# Altium PCB EE209_PCB.PcbDoc
Units mm, origin at the board's own origin, x right, y up, seen from the top; angles counter-clockwise.
Board outline 81.03 x 67.82 mm, 2 copper layers (Top Layer, Bottom Layer); 11 components, 12 nets, 35 pads, 4 vias.
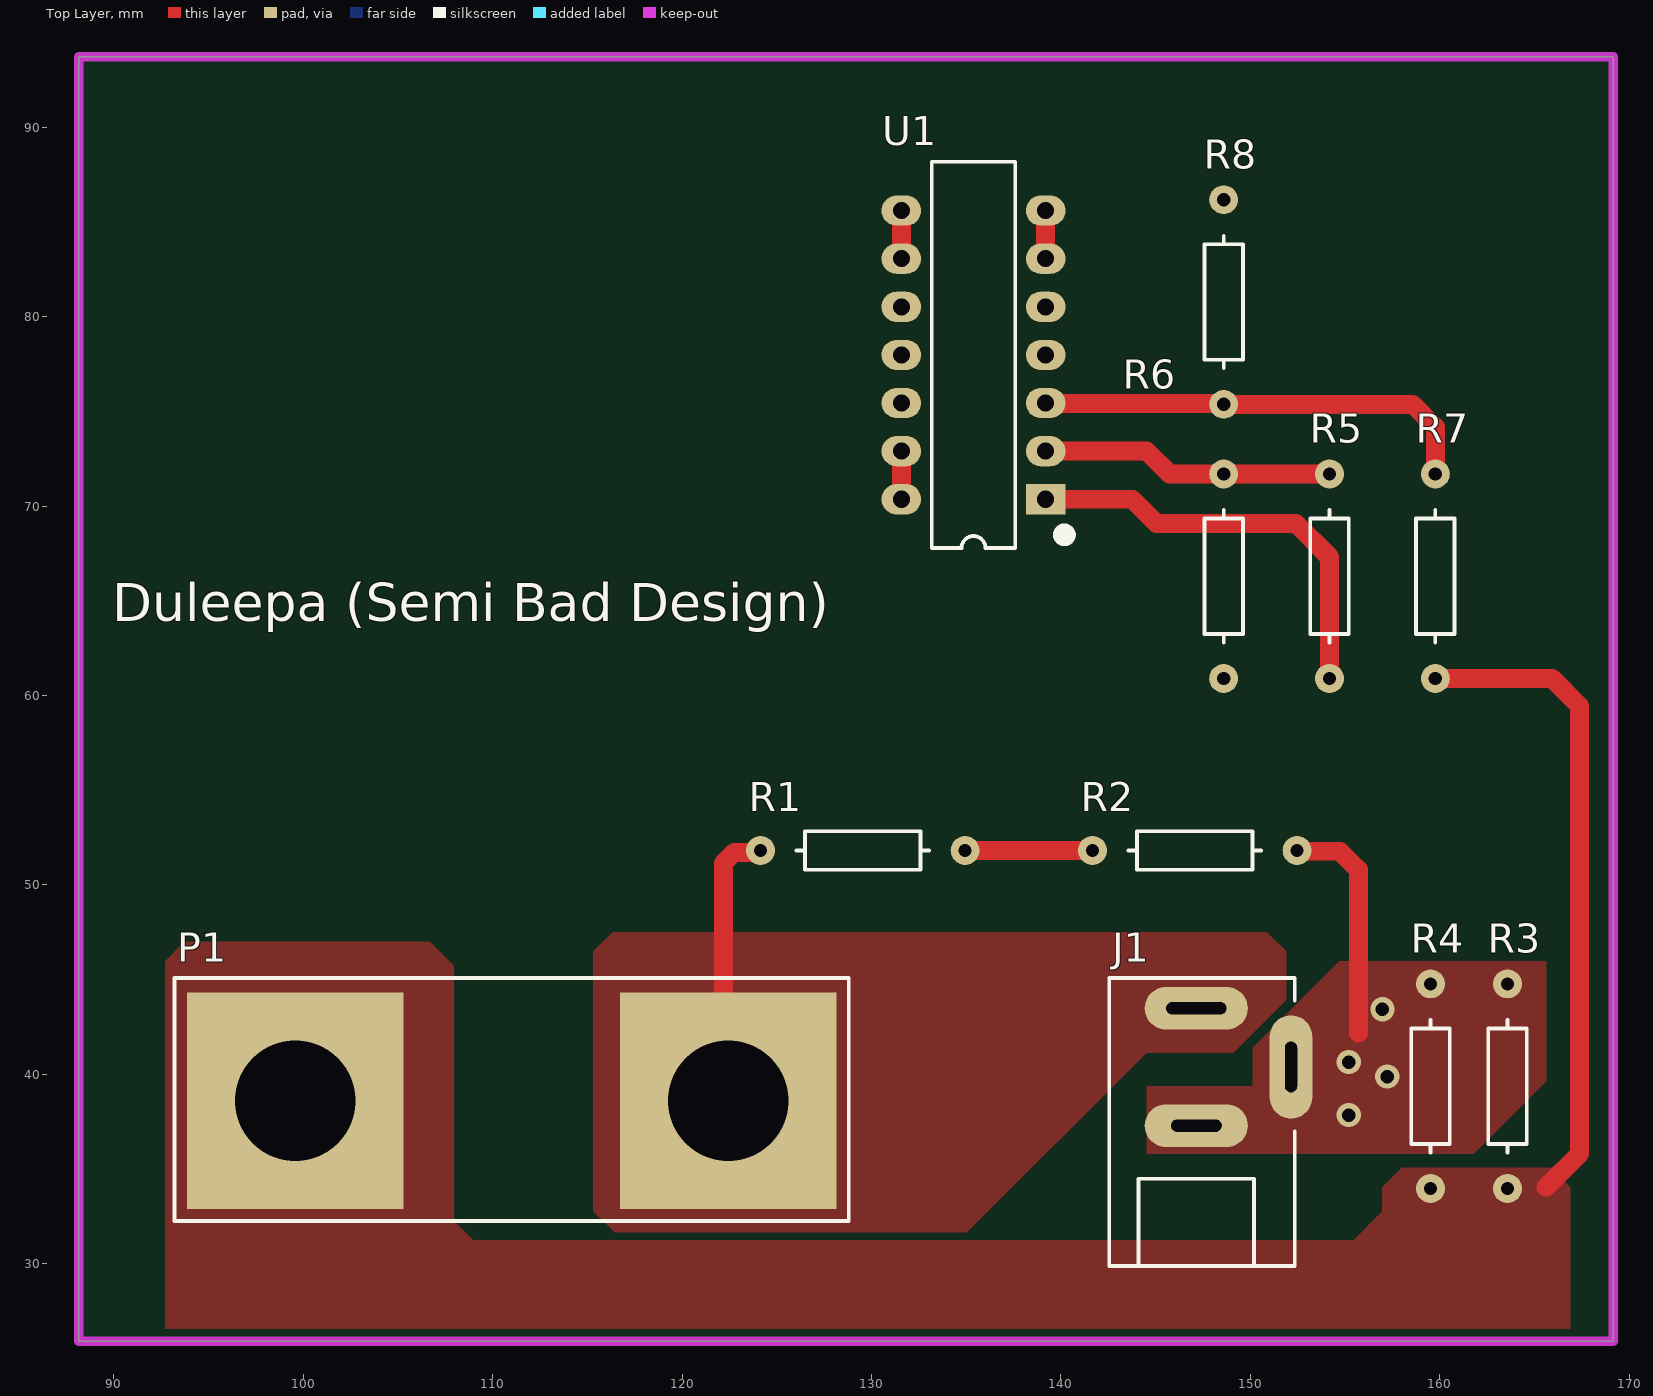
[diagram p0: Top Layer view]
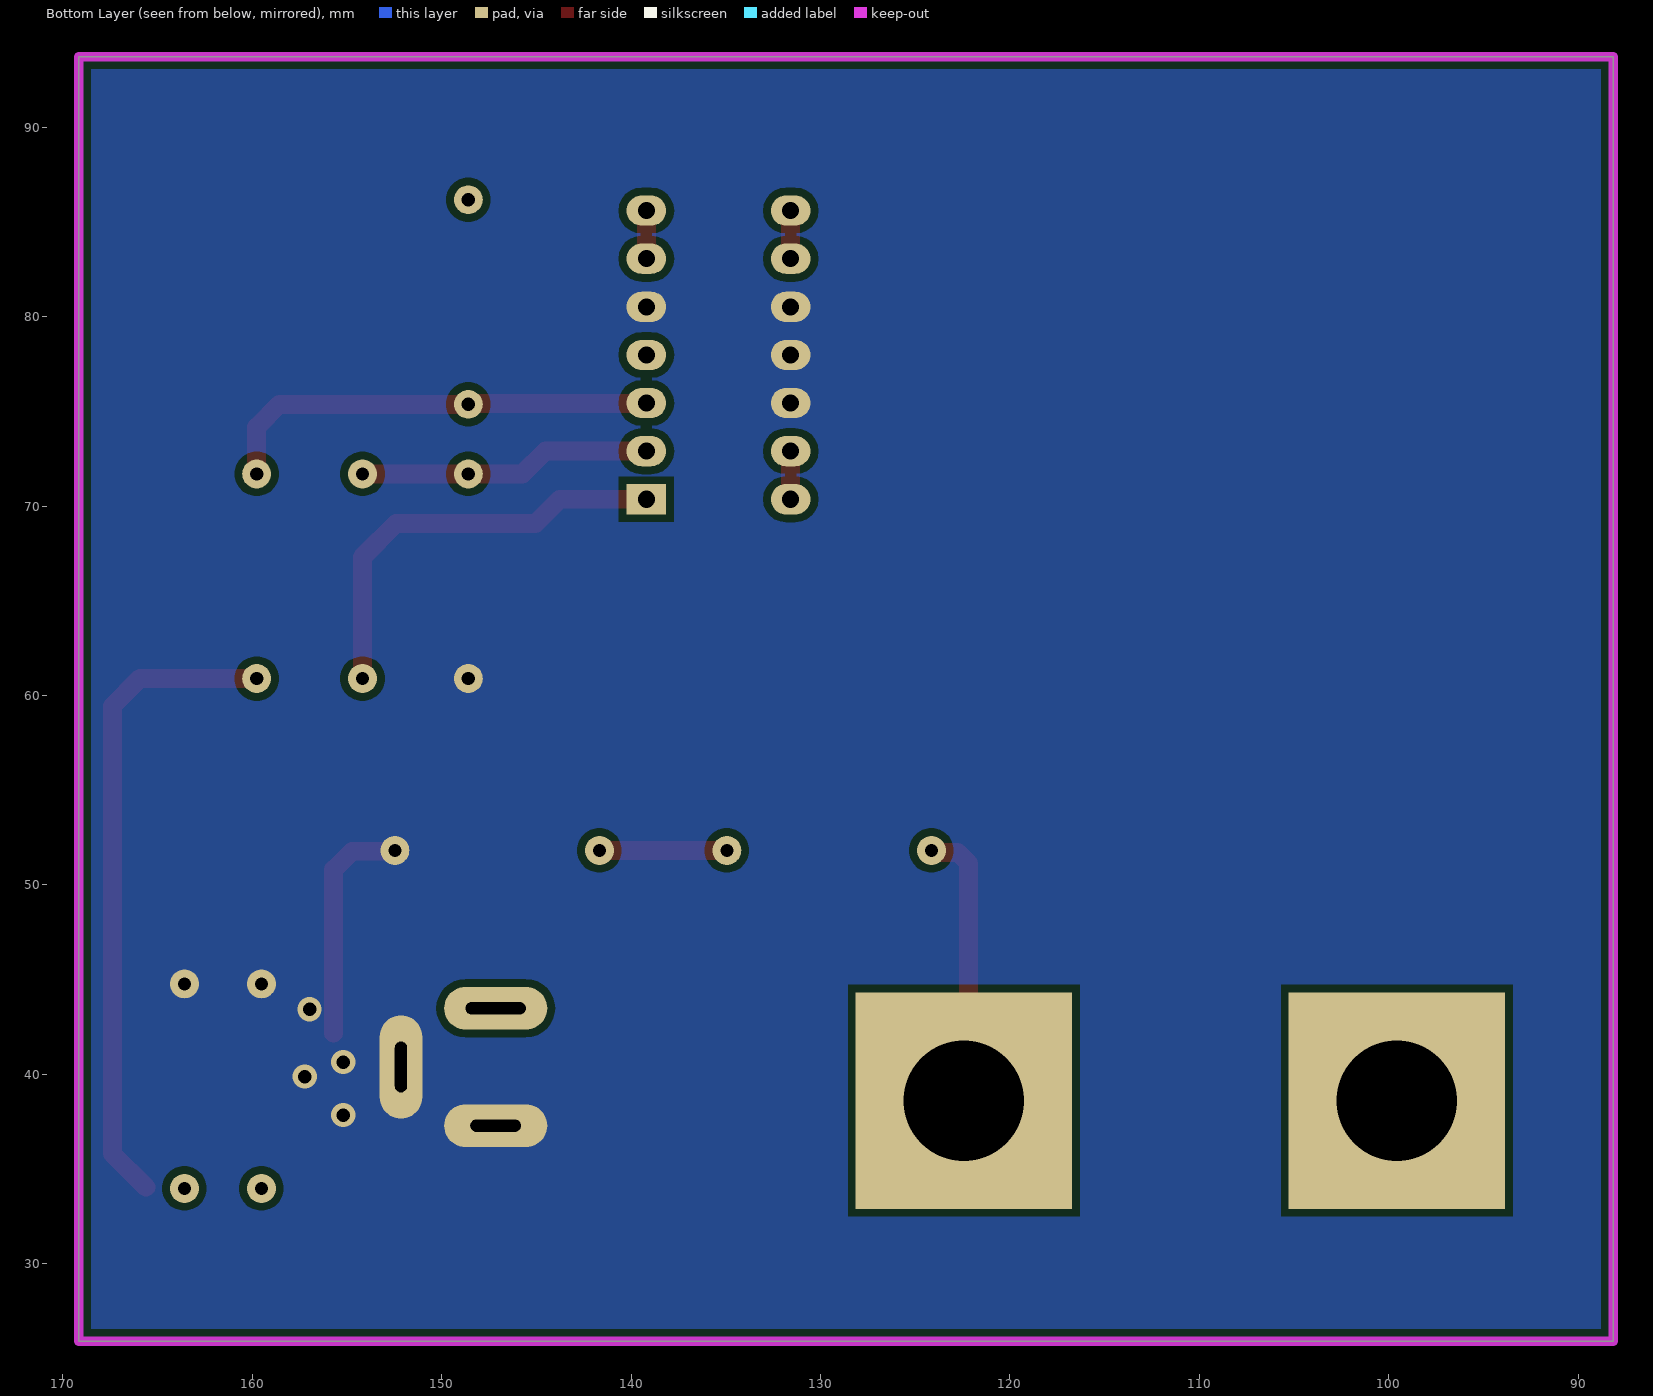
[diagram p1: Bottom Layer view, seen from below]
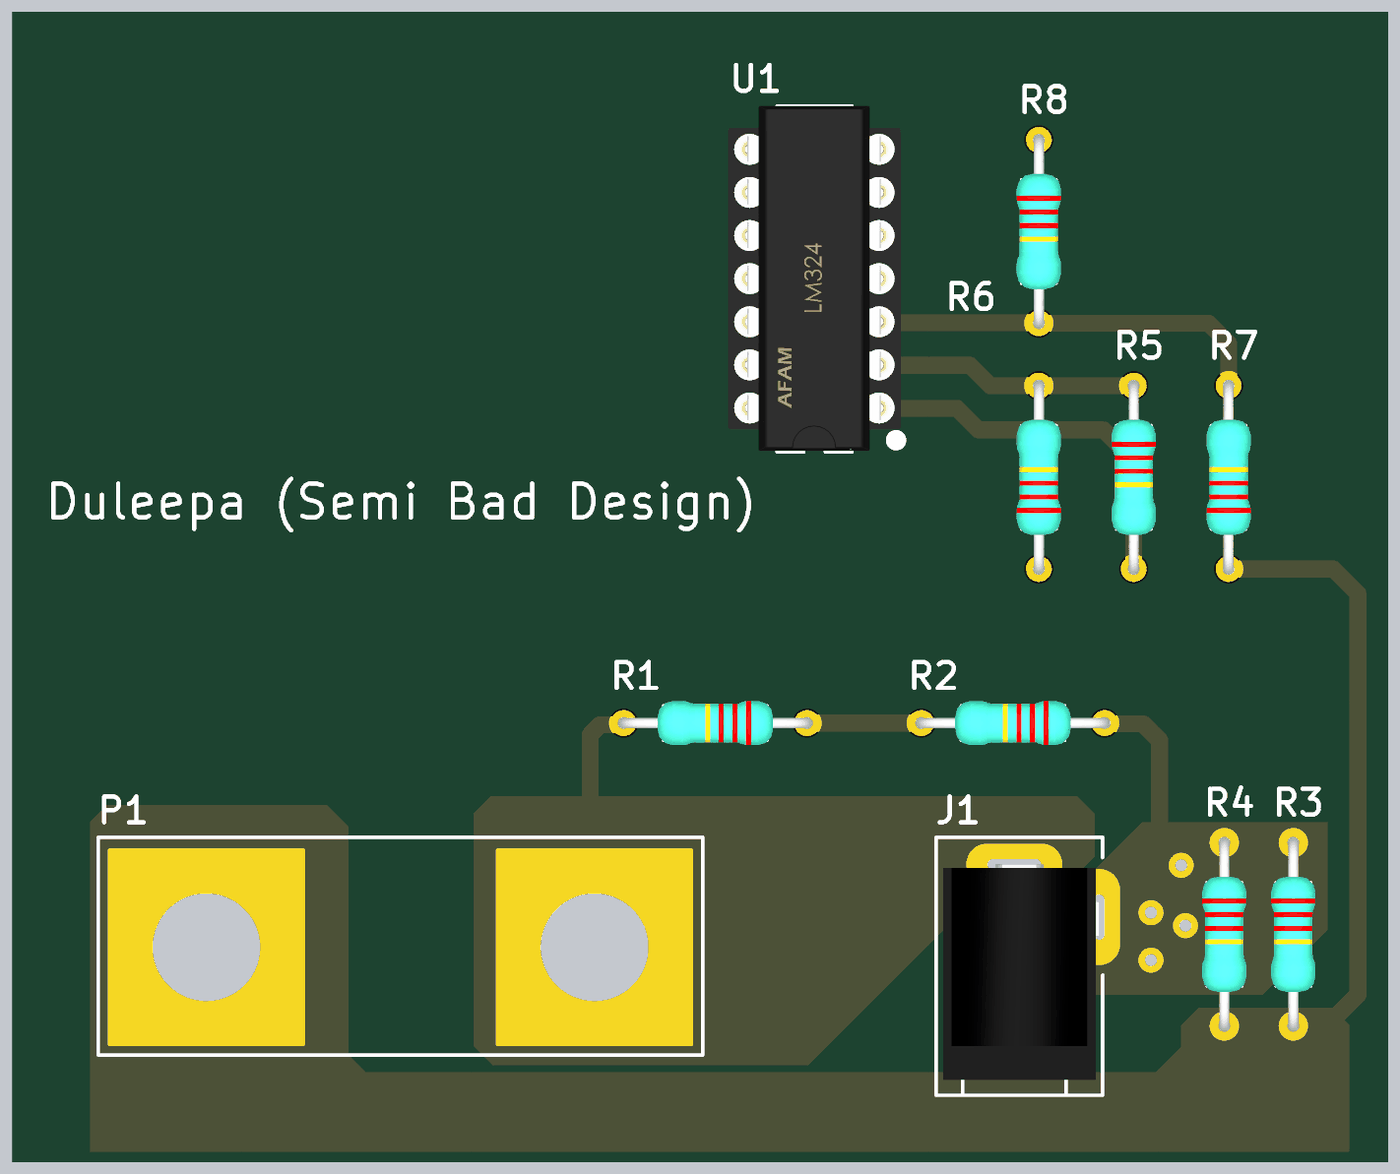
[diagram p2: 3D render of the assembled board from above, using the file's embedded part models]

## Layer stack, top to bottom
Top Solder: solder mask 0.0102, Solder Resist, Dk 3.5
Top Layer: signal copper 0.0356
Dielectric 1: dielectric 0.32, FR-4, Dk 4.8
Bottom Layer: signal copper 0.0356
Bottom Solder: solder mask 0.0102, Solder Resist, Dk 3.5

## Board outline
88.138,25.908 169.164,25.908 169.164,93.726 88.138,93.726

## Design rules (kind name [scope] priority, off if disabled: settings)
BoardOutlineClearance [All] p1: gap=0.5 ignorepadtopadclearanceinfootprint=FALSE
Clearance [All] p1: gap=0.4 ignorepadtopadclearanceinfootprint=FALSE
Height [All] p1: minheight=0 maxheight=50 prefheight=12.7
HoleSize [All] p1: absolutevalues=TRUE maxlimit=10 minlimit=0.4 maxpercent=80.000 minpercent=20.000
MinimumAnnularRing [All] p1: minimumring=0.076
MinimumSolderMaskSliver [All] p1: minsoldermaskwidth=0.1
PlaneConnect [All] p1: planeconnectstyle=Relief reliefexpansion=0.6 reliefentries=4 reliefconductorwidth=0.6 reliefairgap=0.4
PolygonConnect PolygonConnect_1 [All] p1: connectstyle=Direct reliefconductorwidth=0.6 reliefentries=4 polygonreliefangle="90 Angle" airgapwidth=0.4
RoutingVias [All] p1: holewidth=0.6 width=1 viastyle="Through Hole" minholewidth=0.5 minwidth=0.8 maxholewidth=1 maxwidth=2
SMDToCorner [All] p1: distance=157480
SilkToSilkClearance [All] p1: silktosilkclearance=0.1
SilkToSolderMaskClearance [IsPad] p1: minsilkscreentomaskgap=0.1 clearancetoexposedcopper=TRUE
SolderMaskExpansion [All] p1: expansion=0.102 istentingtop=FALSE
Width [All] p1: maxlimit=10 minlimit=0.4 preferedwidth=0.6
24 further rules are at their usual default settings.

## Components (designator, comment, footprint, x,y, rotation, side; value= is the part's Value field where it differs from the comment)
J1 "DC barrel jack" AC-Socket 147.146,37.485 r90 top value=socket
P1 "Dual Banana Plugs" "Dual Banana Plug" 110.998,38.608 r180 top
R1 "100k" AXIAL-0.4 129.54,51.816 r180 top
R2 "1k2" AXIAL-0.4 147.066,51.816 r180 top
R3 "1" AXIAL-0.4 163.576,39.37 r270 top
R4 "1" AXIAL-0.4 159.512,39.37 r270 top
R5 "100k" AXIAL-0.4 154.178,66.294 r270 top
R6 "10k" AXIAL-0.4 148.59,66.294 r90 top
R7 "10k" AXIAL-0.4 159.766,66.294 r90 top
R8 "100k" AXIAL-0.4 148.59,80.772 r270 top
U1 "LM324" DIP-14 135.382,77.978 r180 top

## Footprints (in the part's own frame and the unit in brackets; to place one, negate y for a bottom-side part, rotate by r counter-clockwise, add the part's x,y. Pads: shape width x height; smd on the part's side, far side on the other; paste and mask are expansions set on the pad)
AC-Socket [mm]
  oval 2.25x5.45 hole 0.635 slot 3.175 at 90 deg: 1(6,0)
  oval 5.45x2.25 hole 0.635 slot 2.667 at 0 deg: 2(2.9,-5)
  oval 2.25x5.45 hole 0.635 slot 2.667 at 90 deg: 3(-0.2,0)
  silkscreen extent -7.6,-5.2 7.6,4.6, body extent -6.7,-5 6,4.2, height 10.5
AXIAL-0.4 [mm]
  round 1.524 hole 0.7: 1(-5.4,0) 2(5.4,0)
  silkscreen extent -3.5,-1.02 3.5,1.02, body extent -5.7,-1.3 5.7,1.3, height 2.7
DIP-14 [mm] "DIP; 14 Leads; Row Spacing 7.62 mm; Pitch 2.54 mm"
  rect 2.1x1.6 hole 0.9: 1(-3.81,7.62)
  oval 2.1x1.6 hole 0.9: 2(-3.81,5.08) 3(-3.81,2.54) 4(-3.81,0) 5(-3.81,-2.54) 6(-3.81,-5.08) 7(-3.81,-7.62) 8(3.81,-7.62) 9(3.81,-5.08) 10(3.81,-2.54) 11(3.81,0) 12(3.81,2.54) 13(3.81,5.08) 14(3.81,7.62)
  silkscreen extent -5.1,-10.2 2.2,10.2, body extent -5.07,-10.2 5.09,10.12, height 9.47
"Dual Banana Plug" [mm] "Connector; 2 Position"
  rect 11.43x11.43 hole 6.35: 1(-11.43,0) 2(11.43,0)
  silkscreen extent -17.8,-6.48 17.8,6.35, body extent -17.38,-5.99 17.43,5.99, height 5.5

## Part data
J1: library part AC_Input, "DC barrel jack connection to AC source"
P1: library part AC_Output, "Dual banana plugs connection to the AC load", LatestRevisionDate=17-Jul-2002, LatestRevisionNote="Re-released for DXP Platform.", Publisher="Altium Limited"
R1 R2 R3 R4 R5 R6 R7 R8: library part Res_TH_0AX4, "Through hole resistor", ComponentLink1Description=http://www.royalohm.com/pdf/product2017/PrecisionMetalMF.pdf, LatestRevisionDate=17-Jul-2002, LatestRevisionNote="Re-released for DXP Platform.", PackageReference=AXIAL-0.4, Published=8-Jun-2000, Publisher="Altium Limited"
U1: library part LM324N_TH_DIP16, "IC OPAMP GP 14DIP", Current - Supply=1mA, Manufacturer="ON Semiconductor", Manufacturer Part Number=LM324N, Operating Temperature="0°C ~ 70°C", Package / Case="14-DIP (0.300\", 7.62mm)", Supplier Device Package=14-DIP, Supplier Part Number 1=LM324NFS-ND, Voltage - Supply, Single/Dual (±)="3 V ~ 32 V, ±1.5 V ~ 16 V", Amplifier Type="General Purpose", Base Part Number=LM324, Category="Integrated Circuits (ICs)", ComponentLink1Description=https://www.fairchildsemi.com/datasheets/LM/LM2902.pdf, ComponentLink1URL=https://www.fairchildsemi.com/datasheets/LM/LM2902.pdf, Mounting Type="Through Hole", Output Type=-, Packaging=Tube, Part Status=Active, Pricing 1="1=0.9, 10=0.775, 100=0.5789, 500=0.45482, 1000=0.35145 (NZD)", RoHS="RoHS Compliant", Slew Rate=-, Stock 1=2900, Supplier 1=Digi-Key

## Via types
v1: diameter 1.27, hole 0.711, Top Layer to Bottom Layer, 4 vias

## Nets (pads, with @x,y where several pads share a name; then routed paths per layer and width w, separated by ;. In a path a pad name is that pad's centre, name@x,y a point inside that pad or via, vN(x,y) a via of type N, cw(c..) or ccw(c..) an arc to the next point about the centre after c; other vN are vias at no path point)
2.1V: R8.1
5V: U1.4
GND: J1.2 J1.3 R2.1 R3.1 R4.1 R6.1 U1.5 U1.10 U1.11 U1.12 | length 12.3
  Top Layer w1: R2.1 152.508,51.774 154.728,51.774 155.702,50.8 155.702,42.164
  other v1: 155.194,37.846 157.226,39.878 155.194,40.64 156.972,43.434
NetR5_1: R5.1 R6.2 U1.2 | length 15.5
  Top Layer w1: U1.2 144.526,72.898 145.73,71.694 R6.2 R5.1
NetR5_2: R5.2 U1.1 | length 22.7
  Top Layer w1: U1.1 143.764,70.358 145.034,69.088 152.4,69.088 154.178,67.31 R5.2
NetR7_2: R7.2 R8.2 U1.3 | length 23.6
  Top Layer w1: U1.3 139.225,75.405 148.557,75.405 R8.2 158.562,75.372 159.766,74.168 R7.2
NetU1_6: U1.6 U1.7 | length 2.5
  Top Layer w1: U1.6 U1.7
NetU1_8: U1.8 U1.9 | length 2.5
  Top Layer w1: U1.9 U1.8
NetU1_13: U1.13 U1.14 | length 2.5
  Top Layer w1: U1.14 U1.13
Vac: J1.1 P1.1 R1.2 | length 14.9
  Top Layer w1: P1.1 122.174,38.862 122.174,51.13 122.76,51.716 124.04,51.716 R1.2
Vis: P1.2 R3.2 R4.2 R7.1 | length 34.4
  Top Layer w1: R7.1 165.928,60.894 167.386,59.436 167.386,35.814 165.608,34.036
Vvs: R1.1 R2.2 | length 6.7
  Top Layer w1: R1.1 R2.2

## Polygon pours and split planes (outlines as drawn)
GND on Top Layer "GND_L01_P002" (solid, pour order 2): 144.526,39.37 150.114,39.37 150.114,41.402 154.686,45.974 165.608,45.974 165.608,39.624 161.798,35.814 144.526,35.814
Vac on Top Layer "VAC_L01_P001" (solid, pour order 1): 115.316,46.482 115.316,32.766 117.856,30.226 133.604,30.226 144.526,41.148 149.098,41.148 151.892,43.942 151.892,46.482 150.876,47.498 116.332,47.498
Vis on Top Layer "VIS_L01_P000" (solid, pour order 0): 166.878,34.036 166.878,25.4 92.71,25.4 92.71,45.974 93.726,46.99 106.68,46.99 107.95,45.72 107.95,32.258 108.966,31.242 155.448,31.242 156.972,32.766 156.972,34.036 157.988,35.052 165.862,35.052
GND on Bottom Layer "GND_L02_P003" (solid, pour order 3): 88.646,93.726 168.656,93.726 168.656,25.4 88.646,25.4

## Keep-outs
Keep-Out Layer:
  the board outline again, w0.5

## Silkscreen, mask and mechanical layers (free items; w line width, h text height)
Top Overlay:
  text "Duleepa (Semi Bad Design)" at 89.916,63.912 h2
Mechanical 1:
  the board outline again, w0.5